# Altium PCB 13cmPA_MRF21045-FR4-0.8_V1.2.PcbDoc
Units mm, origin at the board's own origin, x right, y up, seen from the top; angles counter-clockwise.
Board outline 90 x 70 mm, 2 copper layers (Top Layer, Bottom Layer); 1 components, 0 nets, 41 pads, 606 vias.
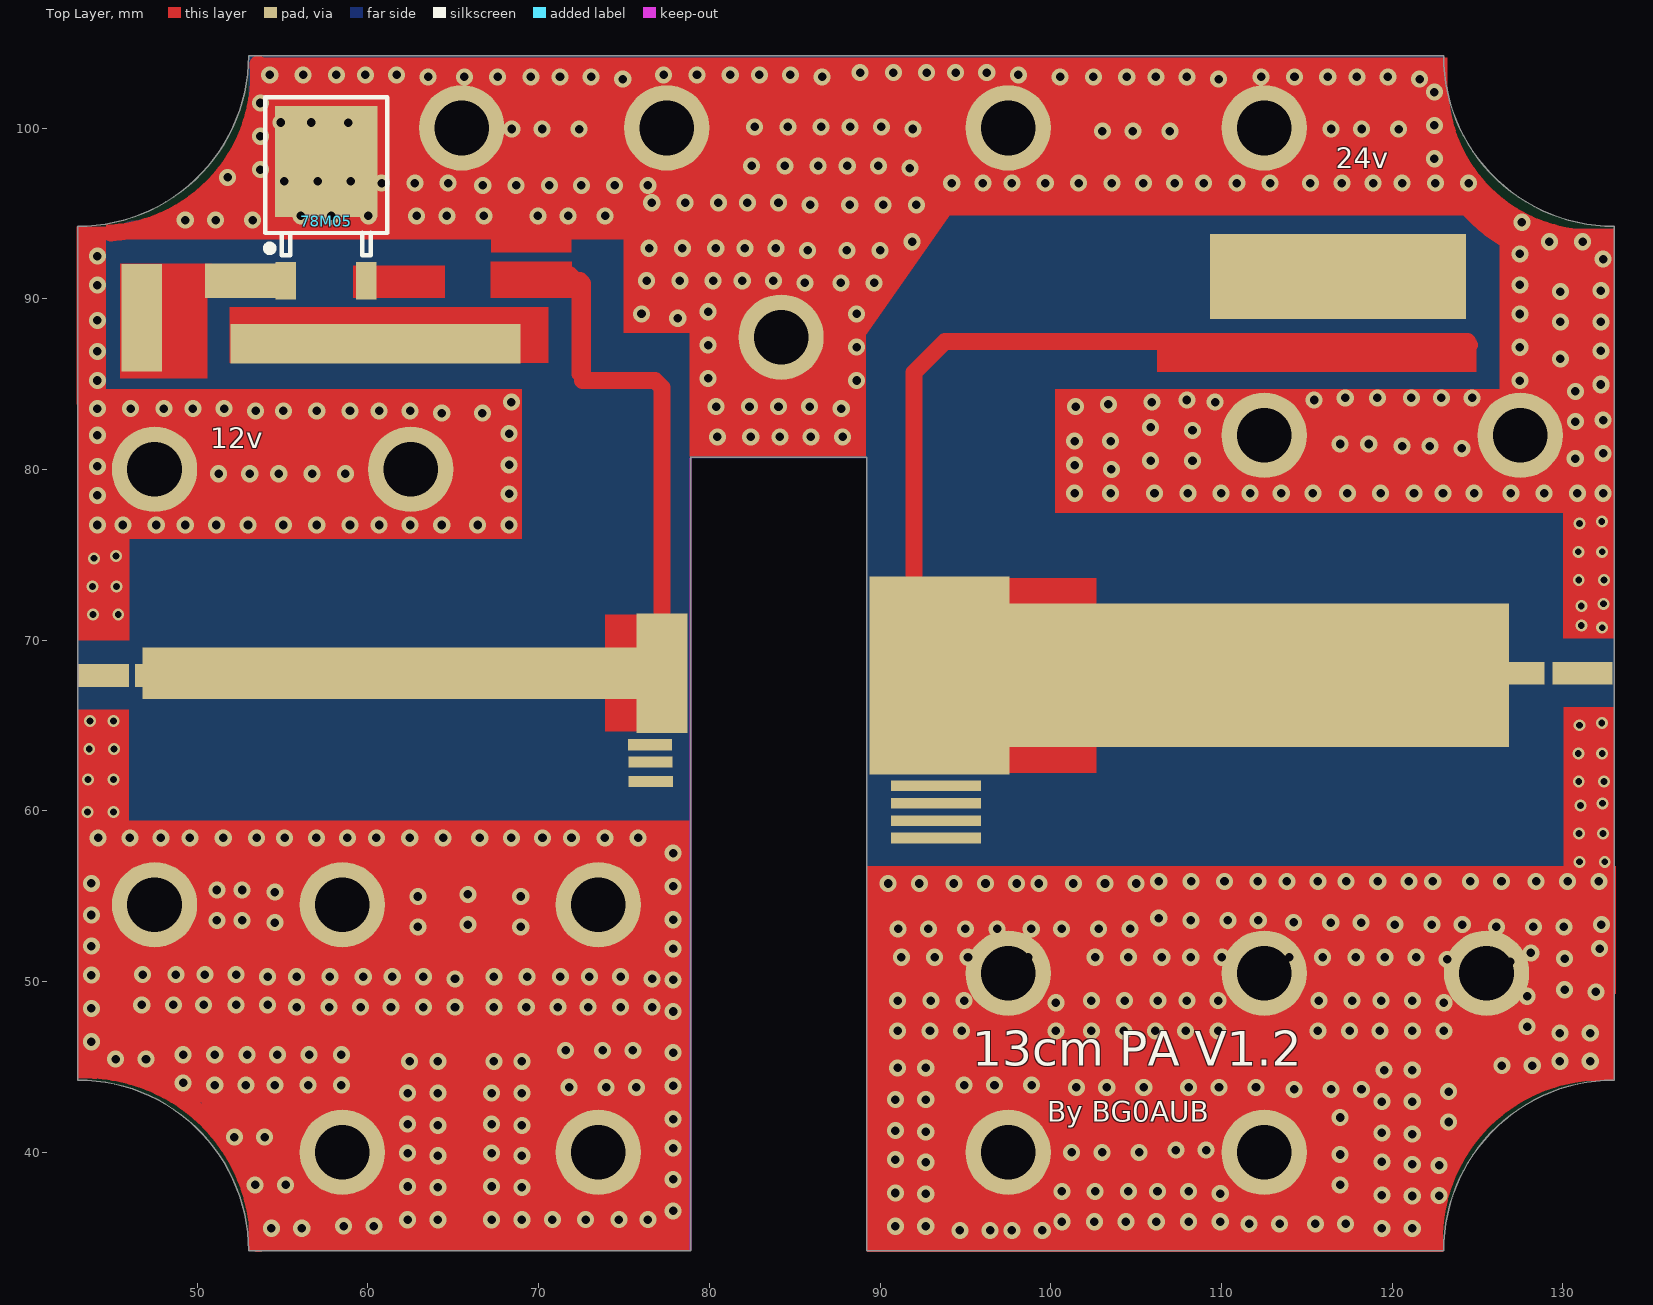
[diagram p0: Top Layer view]
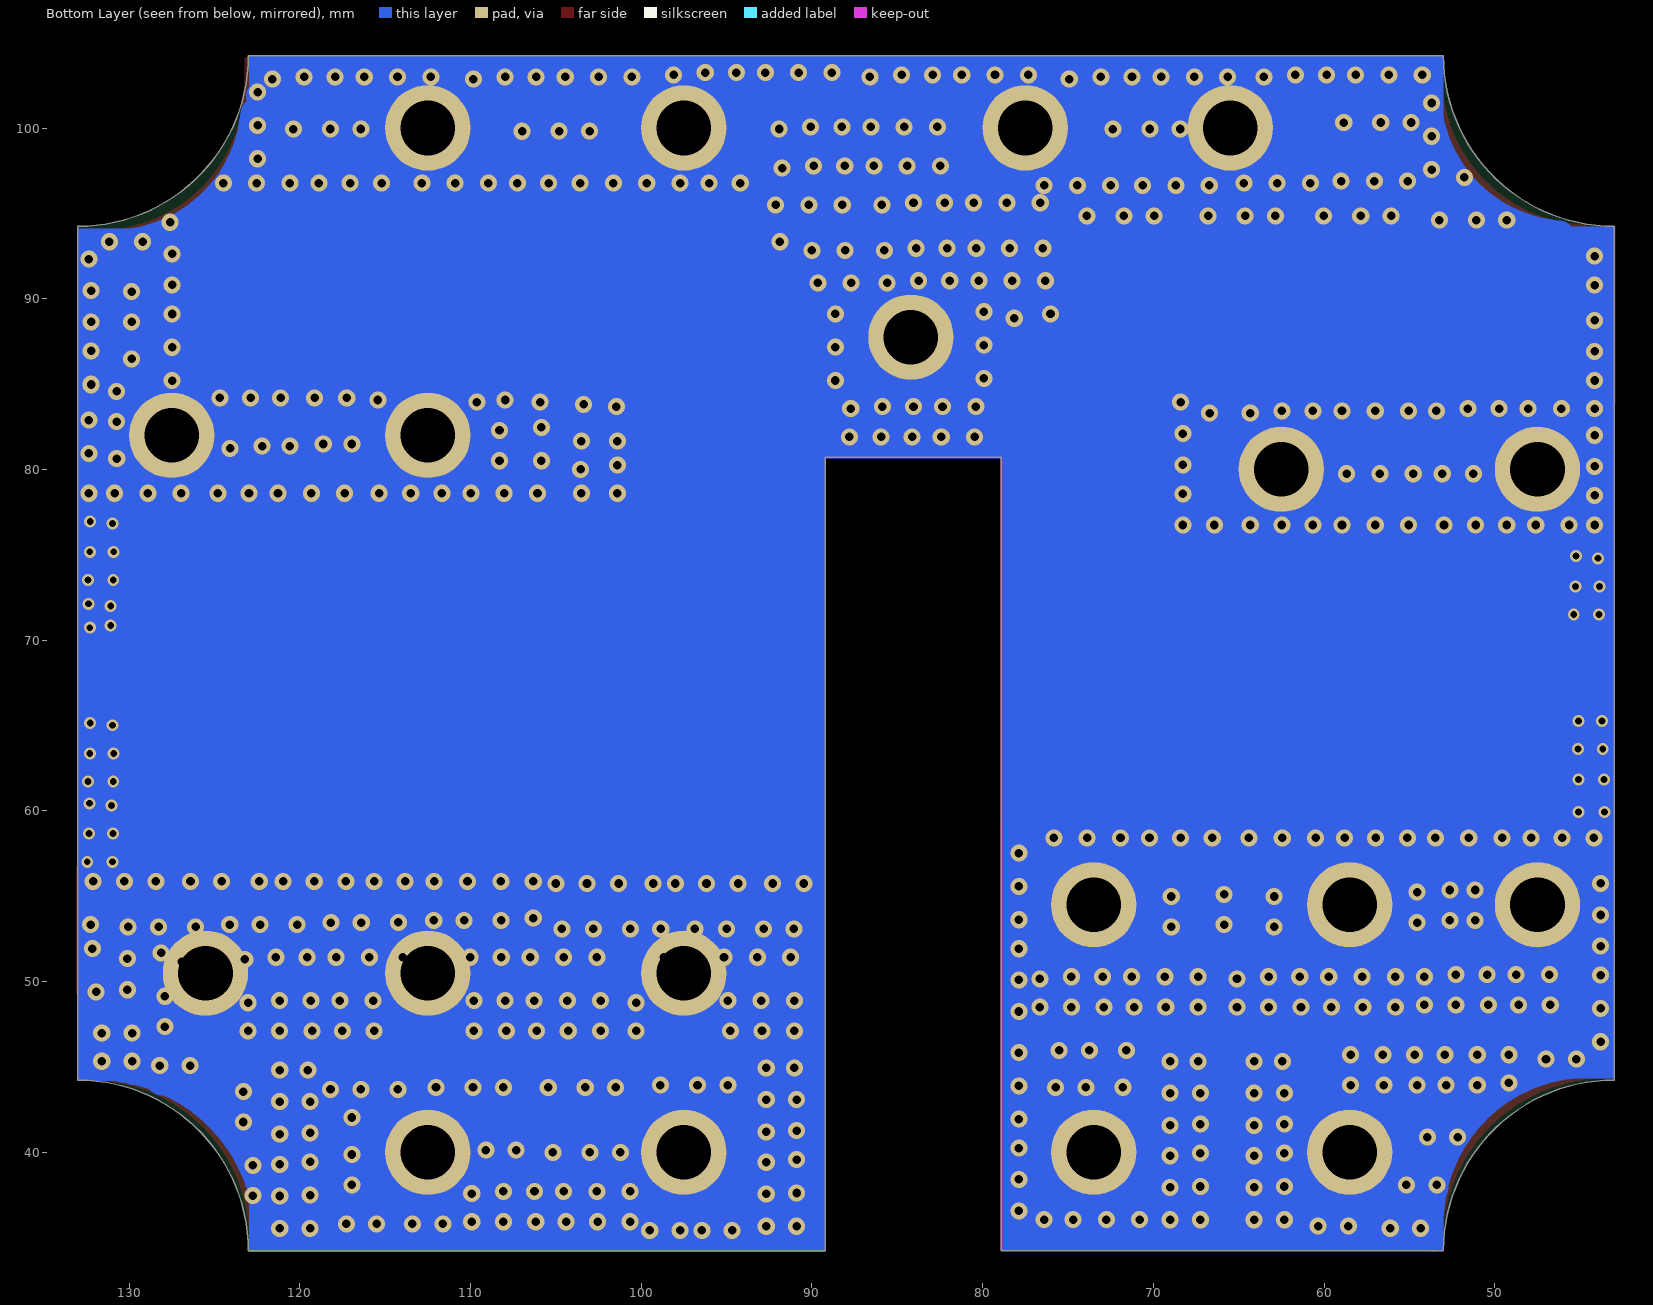
[diagram p1: Bottom Layer view, seen from below]

## Layer stack, top to bottom
Top Layer: signal copper 0.0356
Dielectric: dielectric 0.32, FR-4, Dk 4.8
Bottom Layer: signal copper 0.0356

## Board outline
43.007,44.242 cw(c43.007,34.242) 53.007,34.242 78.899,34.242 78.899,80.732 89.212,80.732 89.212,34.242 123.007,34.242 cw(c133.007,34.242) 133.007,44.242 133.007,94.242 cw(c133.007,104.242) 123.007,104.242 53.007,104.242 cw(c43.007,104.242) 43.007,94.242

## Design rules (kind name [scope] priority, off if disabled: settings)
Clearance [All] p1: gap=0.254
PolygonConnect [All] p1: connectstyle=Relief reliefconductorwidth=0.254 reliefentries=4 polygonreliefangle="90 Angle"
RoutingVias [All] p1: holewidth=0.711 width=1.27 viastyle="Through Hole" minholewidth=0.711 minwidth=1.27 maxholewidth=0.711 maxwidth=1.27
SilkscreenOverComponentPads [IsPad] p1: minsilkscreentomaskgap=0.254
SolderMaskExpansion [All] p1: expansion=0.102
Width [All] p1: maxlimit=3 minlimit=0.2 preferedwidth=1
27 further rules are at their usual default settings.

## Components (designator, comment, footprint, x,y, rotation, side; value= is the part's Value field where it differs from the comment)
78M05 "Comment" LC-TO-252-2 57.55,91.059 r270 top

## Footprints (in the part's own frame and the unit in brackets; to place one, negate y for a bottom-side part, rotate by r counter-clockwise, add the part's x,y. Pads: shape width x height; smd on the part's side, far side on the other; paste and mask are expansions set on the pad)
LC-TO-252-2 [mm]
  rect 2.2x1.2 smd: 1(0,-2.361) 3(-0.004,2.361)
  rect 6.5x6 smd: 2(-7,0)
  silkscreen extent -10.75,-3.57 -1.5,3.57, body extent -9.74,-3.27 0.2,3.27, height 2.44

## Free pads (board coordinates)
  rect 29x3 smd: 0(61.3,68.072)
  rect 3x1.336 smd: 1(44.5,67.945) 1(47.85,67.945)
  rect 3x7 smd: 2(77.225,68.072)
  rect 2.6x0.65 smd: 3(76.525,63.881) 4(76.55,62.865) 5(76.575,61.722)
  rect 5.25x0.62 smd: 6(93.275,61.468) 7(93.275,60.452) 8(93.275,59.436) 9(93.275,58.42)
  rect 8.2x11.6 smd: 11(93.475,67.945)
  rect 31x8.4 smd: 12(111.35,67.945)
  rect 3.5x1.336 smd: 13(131.15,68.072)
  round 5 hole 3.2: 20(47.5,80.01) 21(62.5,80.01) 22(47.5,54.51) 23(58.5,54.51) 24(73.5,54.51) 27(97.5,40.01) 27(97.5,50.5) 27(112.5,50.5) 27(125.525,50.5) 28(112.5,40) 29(73.5,40.01) 30(58.5,40.01) 31(84.2,87.757) 32(77.5,100.01) 33(65.5,100.01) 34(97.5,100.01) 35(112.5,100.01) 36(112.5,82) 37(127.5,82)
  rect 17x2.32 smd: 38(60.45,87.376)
  rect 15x5 smd: 39(116.825,91.313)
  rect 2.4x6.3 smd: 40(46.75,88.9)
  rect 5x2 smd: 46(52.95,91.059)
  rect 4x1.336 smd: 49(126.925,68.072)

## Via types
v1: diameter 1, hole 0.5, Top Layer to Bottom Layer, 570 vias
v2: diameter 0.7, hole 0.4, Top Layer to Bottom Layer, 36 vias

## Nets (pads, with @x,y where several pads share a name; then routed paths per layer and width w, separated by ;. In a path a pad name is that pad's centre, name@x,y a point inside that pad or via, vN(x,y) a via of type N, cw(c..) or ccw(c..) an arc to the next point about the centre after c; other vN are vias at no path point)
pads on no net: 78M05.1 78M05.2 78M05.3
copper on no net: | length 350.2
  Top Layer w0.63: 71.902,91.567 72.225,91.244 72.225,91.142 72.225,91.111 72.225,85.573 72.581,85.217 72.75,85.217 76.821,85.217 77.225,84.813 77.225,78.994 ; 77.225,68.072 77.225,79.502 ; 93.4,72.037 93.475,67.945
  Top Layer w0.812: 124.42,87.503 124.625,87.298
  Top Layer w1: 43.45,44.831 cw(c43.433,34.688) 53.575,34.671 ; 44.95,93.853 ccw(c44.309,103.118) 53.575,103.759 ; 71.725,91.059 72.41,91.059 72.581,90.888 72.581,85.217 72.75,85.217 76.821,85.217 77.225,84.813 77.225,68.072 ; 91.981,72.39 91.981,85.682 93.802,87.503 100.55,87.503 ; 99.425,87.503 124.42,87.503 ; 121.775,36.703 cw(c130.9,35.579) 132.025,44.704 ccw(c132.266,34.913) 122.475,34.671 ; 122.525,100.965 ccw(c130.667,100.598) 130.3,92.456 ; v1@122.7,100.584 ccw(c130.919,101.565) 131.9,93.345 ; v1(122.75,37.465) cw(c128.607,38.847) 127.225,44.704 ; 122.775,43.561 cw(c123.896,43.582) 123.875,44.704 ; 122.825,101.727 ccw(c131.727,102.501) 132.5,93.599 ; v1@123.1,41.402 cw(c125.487,42.063) 124.825,44.45
  Top Layer w1.5: 91.675,72.898 93.4,71.173 93.475,67.945 93.4,71.679
  Bottom Layer w2: 43.95,45.339 cw(c44.518,35.882) 53.975,36.449 ; 44.75,92.964 ccw(c47.055,100.984) 55.075,98.679 ; 46.275,93.599 ccw(c45.565,102.16) v1@54.125,102.87 ; 47.9,46.228 cw(c46.672,39.201) v1@53.7,37.973 ; v1@121.375,40.64 cw(c127.684,38.649) v1@129.675,44.958 ; v1@121.555,35.683 cw(c129.689,36.334) 128.025,44.323 ; 121.65,35.179 cw(c131.867,34.996) v1@132.05,45.212 ; v1@122.15,101.854 ccw(c129.589,99.64) v1@127.375,92.202 ; 122.475,100.838 ccw(c131.036,101.652) 131.85,93.091
  other v1: 94.672,35.433 96.45,35.433 97.722,35.433 99.5,35.433 119.395,35.547 121.173,35.547 54.347,35.56 56.125,35.56 90.895,35.674 92.673,35.674 58.572,35.687 60.35,35.687 111.622,35.814 113.4,35.814 115.497,35.814 117.275,35.814 100.65,35.941 102.55,35.941 104.4,35.941 106.175,35.941 108.075,35.941 109.925,35.941 62.32,36.055 64.098,36.055 67.245,36.055 69.023,36.055 70.8,36.068 72.75,36.068 74.7,36.068 76.4,36.068 77.875,36.572 121.173,37.447 119.395,37.497 92.673,37.574 109.925,37.592 90.895,37.624 100.65,37.719 102.6,37.719 104.55,37.719 106.25,37.719 108.075,37.719 64.098,37.955 69.023,37.955 62.32,38.005 67.245,38.005 53.397,38.1 55.175,38.1 116.95,38.1 77.875,38.422 122.75,39.243 121.173,39.297 92.673,39.424 119.395,39.447 90.895,39.574 64.098,39.805 69.023,39.805 116.95,39.878 62.32,39.955 67.245,39.955 101.225,40.005 103.003,40.005 105.171,40.002 107.325,40.132 109.103,40.132 77.875,40.247 52.172,40.894 53.95,40.894 121.173,41.072 119.395,41.147 92.673,41.199 90.895,41.274 64.098,41.58 69.023,41.58 62.32,41.655 67.245,41.655 123.3,41.783 77.875,41.947 116.953,42.046 119.395,42.972 121.173,42.972 90.895,43.099 92.673,43.099 62.32,43.48 64.098,43.48 67.245,43.48 69.023,43.48 123.3,43.561 114.254,43.691 116.422,43.688 118.2,43.688 71.779,43.818 73.947,43.815 75.725,43.815 101.5,43.815 103.278,43.815 105.446,43.812 108.075,43.815 109.853,43.815 112.021,43.812 77.875,43.897 51.025,43.942 52.85,43.942 54.55,43.942 56.5,43.942 58.45,43.942 94.925,43.942 96.703,43.942 98.871,43.939 49.175,44.069 119.522,44.822 121.173,44.822 91.022,44.949 92.673,44.949 126.422,45.085 128.2,45.085 62.447,45.33 64.098,45.33 67.372,45.33 69.023,45.33 129.822,45.339 131.6,45.339 45.222,45.466 47,45.466 49.175,45.72 51.025,45.72 52.925,45.72 54.7,45.72 56.55,45.72 58.45,45.72 77.875,45.847 71.579,45.977 73.747,45.974 75.525,45.974 43.8,46.482 129.822,46.99 131.6,46.99 91.025,47.117 92.925,47.117 94.775,47.117 100.3,47.117 102.375,47.117 104.275,47.117 106.125,47.117 107.9,47.117 109.8,47.117 115.65,47.117 117.5,47.117 119.275,47.117 121.175,47.117 123.025,47.117 127.9,47.371 77.875,48.256 43.8,48.432 55.825,48.514 57.725,48.514 59.575,48.514 61.35,48.514 63.25,48.514 65.1,48.514 67.375,48.514 69.275,48.514 71.125,48.514 72.9,48.514 74.8,48.514 76.65,48.514 46.75,48.641 48.6,48.641 50.375,48.641 52.275,48.641 54.125,48.641 100.3,48.768 123.025,48.768 91.025,48.895 92.975,48.895 94.925,48.895 102.375,48.895 104.325,48.895 106.275,48.895 107.975,48.895 109.8,48.895 115.7,48.895 117.65,48.895 119.35,48.895 121.175,48.895 127.9,49.149 131.925,49.403 130.1,49.53 77.875,50.106 65.1,50.165 76.65,50.165 54.125,50.292 55.825,50.292 57.775,50.292 59.725,50.292 61.425,50.292 63.25,50.292 67.375,50.292 69.325,50.292 71.275,50.292 72.975,50.292 74.8,50.292 43.8,50.382 46.8,50.419 48.75,50.419 50.45,50.419 52.275,50.419 125.075,51.181 126.9,51.181 123.225,51.308 130.1,51.355 91.25,51.435 93.2,51.435 95.15,51.435 96.85,51.435 98.675,51.435 102.6,51.435 104.55,51.435 106.5,51.435 108.2,51.435 110.025,51.435 113.975,51.435 115.925,51.435 117.875,51.435 119.575,51.435 121.4,51.435 128.125,51.689 77.875,51.931 132.15,51.943 43.8,52.082 91.054,53.089 92.832,53.089 95,53.089 96.85,53.089 98.854,53.089 100.632,53.089 102.8,53.089 104.65,53.089 62.925,53.213 68.95,53.213 126.104,53.216 128.272,53.213 130.05,53.213 65.85,53.34 120.154,53.343 122.322,53.34 124.1,53.34 132.254,53.343 54.55,53.467 114.229,53.47 116.397,53.467 118.175,53.467 51.15,53.594 52.625,53.594 108.204,53.597 110.372,53.594 112.15,53.594 77.875,53.631 106.325,53.721 43.8,53.907 62.925,54.991 68.95,54.991 65.85,55.118 54.55,55.245 51.15,55.372 52.625,55.372 77.875,55.581 43.8,55.757 90.475,55.753 92.3,55.753 94.325,55.753 96.175,55.753 98,55.753 99.3,55.753 101.325,55.753 103.175,55.753 105,55.753 106.325,55.88 108.225,55.88 110.175,55.88 112.125,55.88 113.825,55.88 115.65,55.88 117.3,55.88 119.15,55.88 120.975,55.88 122.375,55.88 124.575,55.88 126.4,55.88 128.425,55.88 130.275,55.88 132.1,55.88 77.875,57.531 44.2,58.42 46.05,58.42 47.875,58.42 49.575,58.42 51.525,58.42 53.475,58.42 55.125,58.42 56.975,58.42 58.8,58.42 60.5,58.42 62.45,58.42 64.4,58.42 66.55,58.42 68.4,58.42 70.225,58.42 71.925,58.42 73.875,58.42 75.825,58.42 44.15,76.753 45.65,76.753 47.6,76.753 49.3,76.753 51.125,76.753 52.975,76.753 55.05,76.753 57,76.753 58.95,76.753 60.65,76.753 62.475,76.753 64.325,76.753 66.425,76.753 68.275,76.753 44.15,78.486 68.275,78.576 101.4,78.613 103.5,78.613 106.075,78.613 108.025,78.613 109.975,78.613 111.675,78.613 113.5,78.613 115.35,78.613 117.375,78.613 119.325,78.613 121.275,78.613 122.975,78.613 124.8,78.613 126.95,78.613 128.9,78.613 130.85,78.613 132.35,78.613 51.25,79.756 53.075,79.756 54.775,79.756 56.725,79.756 58.675,79.756 103.55,80.01 44.15,80.186 68.275,80.276 101.4,80.264 105.85,80.518 108.3,80.518 130.722,80.636 132.35,80.944 124.075,81.243 120.575,81.37 122.2,81.37 116.95,81.497 118.625,81.497 101.4,81.661 103.5,81.661 80.475,81.915 82.425,81.915 84.125,81.915 85.95,81.915 87.8,81.915 44.15,82.011 68.275,82.101 108.3,82.296 105.85,82.468 130.725,82.804 132.35,82.894 64.325,83.312 66.7,83.312 53.425,83.439 55.05,83.439 57,83.439 58.95,83.439 60.65,83.439 62.475,83.439 44.15,83.566 46.1,83.566 48.05,83.566 49.75,83.566 51.575,83.566 87.725,83.566 80.4,83.693 82.35,83.693 84.05,83.693 85.875,83.693 101.45,83.693 103.375,83.82 68.402,83.951 105.925,83.947 109.625,83.947 107.975,84.074 115.425,84.074 117.25,84.201 119.125,84.201 121.125,84.201 122.875,84.201 124.675,84.201 130.725,84.582 132.223,84.959 132.223,85.004 44.15,85.217 88.625,85.217 127.473,85.213 79.925,85.344 129.847,86.478 44.15,86.917 132.223,86.954 88.625,87.167 127.473,87.163 79.925,87.294 129.85,88.646 132.223,88.654 44.15,88.742 78.15,88.863 127.473,89.113 76.025,89.117 88.625,89.117 79.925,89.244 129.85,90.424 132.223,90.479 44.15,90.805 127.473,90.813 85.6,90.932 87.7,90.932 89.65,90.932 76.325,91.059 78.275,91.059 80.225,91.059 81.925,91.059 83.75,91.059 132.35,92.329 44.15,92.505 127.473,92.638 85.75,92.837 88.05,92.837 90,92.837 76.475,92.964 78.425,92.964 80.375,92.964 82.075,92.964 83.9,92.964 91.875,93.345 129.2,93.345 131.15,93.345 127.6,94.488 49.3,94.615 51.078,94.615 53.246,94.612 56.075,94.861 57.853,94.861 60.021,94.861 62.85,94.861 64.628,94.861 66.796,94.861 69.95,94.861 71.728,94.861 73.896,94.861 85.9,95.504 88.225,95.504 90.175,95.504 92.125,95.504 76.625,95.631 78.575,95.631 80.525,95.631 82.225,95.631 84.05,95.631 66.725,96.647 68.675,96.647 70.625,96.647 72.5,96.647 74.45,96.647 76.4,96.647 60.8,96.774 62.75,96.774 64.7,96.774 94.2,96.774 96.025,96.774 97.725,96.774 99.675,96.774 101.625,96.774 103.575,96.774 105.425,96.774 107.25,96.774 108.95,96.774 110.9,96.774 112.85,96.774 115.2,96.774 117.05,96.774 118.875,96.774 120.575,96.774 122.525,96.774 124.475,96.774 55.1,96.901 57.05,96.901 59,96.901 51.775,97.118 53.7,97.573 91.75,97.663 82.475,97.79 84.425,97.79 86.375,97.79 88.075,97.79 89.9,97.79 122.475,98.208 53.7,99.523 103.025,99.822 104.803,99.822 106.971,99.819 68.425,99.949 70.203,99.949 72.371,99.946 91.925,99.949 116.425,99.949 118.203,99.949 120.371,99.946 82.65,100.076 84.6,100.076 86.55,100.076 88.25,100.076 90.075,100.076 122.475,100.158 54.9,100.33 56.678,100.33 58.846,100.327 53.7,101.473 122.475,102.108 74.925,102.87 109.825,102.87 121.6,102.87 63.525,102.997 65.65,102.997 67.6,102.997 69.55,102.997 71.25,102.997 73.075,102.997 86.6,102.997 100.55,102.997 102.5,102.997 104.45,102.997 106.15,102.997 107.975,102.997 112.325,102.997 114.275,102.997 116.225,102.997 117.925,102.997 119.75,102.997 54.25,103.124 56.2,103.124 58.15,103.124 59.85,103.124 61.675,103.124 77.325,103.124 79.275,103.124 81.225,103.124 82.925,103.124 84.75,103.124 98.1,103.124 88.825,103.251 90.775,103.251 92.725,103.251 94.425,103.251 96.25,103.251
  other v2: 130.975,57.023 132.45,57.023 130.95,58.674 132.35,58.674 43.575,59.944 45.1,59.944 131.025,60.325 132.325,60.452 130.925,61.722 132.4,61.722 43.6,61.849 45.1,61.849 130.9,63.373 132.3,63.373 43.675,63.627 45.125,63.627 130.975,65.024 132.275,65.151 43.725,65.278 45.1,65.278 132.3,70.739 131.075,70.866 43.9,71.501 45.375,71.501 131.075,72.009 132.375,72.136 43.875,73.152 45.275,73.152 130.925,73.533 132.4,73.533 43.95,74.803 45.25,74.93 130.9,75.184 132.3,75.184 130.975,76.835 132.275,76.962

## Polygon pours and split planes (outlines as drawn)
no net on Top Layer "Top Layer-No Net" (solid, pour order 22): 115.675,51.054 115.675,44.323 116.183,44.831 121.4,44.831 121.4,49.917 121.025,50.292
no net on Top Layer "Top Layer-No Net 2" (solid, pour order 24): 76.525,66.294
no net on Top Layer "Top Layer-No Net 1" (solid, pour order 26): 74.9,69.596

## Keep-outs
Keep-Out Layer:
  lines w0.1: 78.9,34.29 78.9,80.645

## Other copper
Top Layer:
  rectangle: 73.9,64.643 76.15,71.501
  rectangle: 97.175,62.23 102.675,73.66
  rectangle: 130.025,55.372 133.05,66.085
  rectangle: 130,70.104 133.025,78.023
  rectangle: 42.975,59.182 46,65.958
  rectangle: 43,69.977 46.025,76.245
  rectangle: 106.225,85.725 124.95,87.63
  rectangle: 59.125,90.043 64.525,91.948
  rectangle: 50.175,93.472 51.525,96.393
  rectangle: 122.075,94.869 124.975,96.393
  rectangle: 49.025,42.926 51.325,44.196
  rectangle: 50.25,42.037 51.2,44.323
  rectangle: 47.55,43.688 51.475,44.704
  rectangle: 50.9,40.894 52.172,45.593
  rectangle: 51.925,39.243 53.2,45.339
  rectangle: 52.2,97.573 53.7,99.187
  rectangle: 47.6,94.107 49.125,94.615
  rectangle: 48.975,94.361 50.875,95.377
  rectangle: 44.65,93.472 50.675,94.361
  rectangle: 93.4,94.869 123.25,96.012
  rectangle: 51.2,93.472 76.35,97.663
  rectangle: 126.275,82.804 133.025,94.107
  rectangle: 53.2,95.758 123.25,104.14
  rectangle: 74.975,88.011 89.125,96.012
  region: 89.4,102.388 81.442,91.022 88.1,86.36 96.058,97.726
  rectangle: 43.025,75.946 69.025,84.709
  rectangle: 42.925,83.82 44.65,94.234
  rectangle: 89.225,34.163 122.975,53.848
  rectangle: 105.225,49.276 133.1,56.769
  rectangle: 122.25,44.196 133,49.53
  rectangle: 53,34.29 78.85,59.436
  rectangle: 42.975,44.323 53.375,59.436
  rectangle: 100.25,77.47 133.025,84.709
  rectangle: 78.825,80.772 89.175,88.519
  rectangle: 47.2,90.043 50.85,92.075
  rectangle: 67.175,90.043 71.95,92.202
  rectangle: 45.475,85.344 50.6,92.075
  rectangle: 89.225,53.721 105.225,56.769
  rectangle: 51.9,86.233 70.575,89.535
  rectangle: 67.2,92.71 71.925,94.107
Bottom Layer:
  rectangle: 43,44.323 53.5,94.234
  rectangle: 122.875,44.196 133.025,94.107
  rectangle: 78.85,80.645 89.225,104.267
  rectangle: 53,34.29 78.85,104.267
  rectangle: 89.225,34.163 122.975,104.267

## Silkscreen, mask and mechanical layers (free items; w line width, h text height)
Top Overlay:
  text "24v" at 116.7,97.663 h1.2
  text "12v" at 50.775,81.243 h1.2
  text "13cm PA V1.2" at 95.4,45.085 h2
  text "By BG0AUB" at 99.8,41.783 h1.2
Top Solder:
  rectangle: 49.275,91.186 75.5,94.742
  rectangle: 89.15,83.312 126.6,95.758
  rectangle: 44.525,83.82 78.925,93.599
  rectangle: 94.075,92.71 125.5,97.536
  rectangle: 50.725,94.361 74.975,95.758
  rectangle: 104.65,83.693 126.45,86.36
  rectangle: 44.45,83.185 68.975,86.487
  rectangle: 89.175,57.658 133.075,76.581
  rectangle: 43.025,60.198 78.825,75.184
  rectangle: 89.125,73.66 97.5,88.011
  rectangle: 68.975,72.263 78.8,88.011
  lines w1.5: 71.55,79.502 71.45,79.602 71.45,81.738 71.627,81.915 77.225,81.915 ; 91.675,72.898 91.675,87.248 96.375,91.948 124.9,91.948 ; 91.675,77.978 94.865,77.978 94.865,79.914 92.09,79.914 ; 91.725,84.709 95.948,84.709 ; 92.09,82.254 95.883,82.254 95.948,82.319 ; 95.802,84.709 95.875,84.636 95.875,82.392
  lines w2: 72.425,91.415 72.425,85.092 77.225,85.092 77.225,68.072
Bottom Solder:
  rectangle: 43,44.323 53.5,94.234
  rectangle: 122.875,44.196 133.025,94.107
  rectangle: 53.025,34.29 78.85,104.267
  rectangle: 78.85,80.645 89.225,104.267
  rectangle: 89.225,34.163 122.975,104.267
  rectangle: 43.15,34.417 53.6,46.736
  rectangle: 122.775,34.29 133,44.323
  rectangle: 122.975,94.107 133.025,104.267
  rectangle: 43,94.107 54.325,104.267
  lines w1.5: 92.09,79.914 92.09,82.254
Mechanical 1:
  lines w0.1: 78.75,34.391 78.75,79.633 ; 78.899,34.242 53.007,34.242 ccw(c43.007,34.242) 43.007,44.242 43.007,94.242 ccw(c43.007,104.242) 53.007,104.242 123.007,104.242 ccw(c133.007,104.242) 133.007,94.242 133.007,44.242 ccw(c133.007,34.242) 123.007,34.242 89.212,34.242 ; 89.175,80.645 78.886,80.645 79.013,80.772 89.175,80.772 89.375,80.572 89.375,34.405 89.212,34.242 ; 89.212,80.645 89.212,34.242